# Altium PCB testPCB.PcbDoc
Units mm, origin at the board's own origin, x right, y up, seen from the top; angles counter-clockwise.
Board outline 152.4 x 101.6 mm, 2 copper layers (Top Layer, Bottom Layer); 1 components, 0 nets, 33 pads, 0 vias.
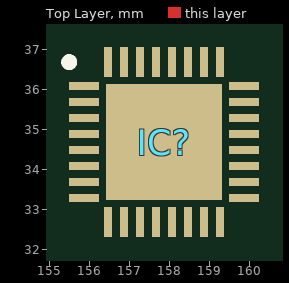
[diagram p0: Top Layer view]
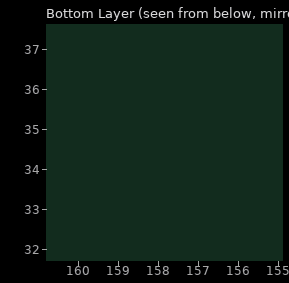
[diagram p1: Bottom Layer view, seen from below]

## Layer stack, top to bottom
Top Solder: solder mask 0.0102, Solder Resist, Dk 3.5
Top Layer: signal copper 0.0356
Dielectric 1: dielectric 0.32, FR-4, Dk 4.8
Bottom Layer: signal copper 0.0356
Bottom Solder: solder mask 0.0102, Solder Resist, Dk 3.5

## Board outline
25.4,25.4 177.8,25.4 177.8,127 25.4,127

## Design rules (kind name [scope] priority, off if disabled: settings)
Clearance [All] p1: gap=0.254 ignorepadtopadclearanceinfootprint=FALSE except(0: Arc-Hole Track-Hole SMDPad-Hole THPad-Hole Via-Hole Fill-Hole Poly-Hole Region-Hole Text-Hole)
PolygonConnect [All] p1: connectstyle=Relief reliefconductorwidth=0.254 reliefentries=4 polygonreliefangle="90 Angle" airgapwidth=0.254
RoomDefinition test_sheet [InComponentClass('test_sheet')] p1: confinementstyle=ConfineIn formatcopy=TRUE lockcomponents=FALSE outline 178.943,26.924 184.531,26.924 184.531,35.052 178.943,35.052
RoutingVias [All] p1: holewidth=0.711 width=1.27 viastyle="Through Hole" minholewidth=0.711 minwidth=1.27 maxholewidth=0.711 maxwidth=1.27
SolderMaskExpansion [All] p1: expansion=0.102 istentingtop=FALSE
Width [All] p1: maxlimit=10 minlimit=0.15 preferedwidth=0.254
30 further rules are at their usual default settings.

## Components (designator, comment, footprint, x,y, rotation, side; value= is the part's Value field where it differs from the comment)
IC? "BQ25731RSNR" QFN40P400X400X80-33N-D 157.861,34.671 r0 top

## Footprints (in the part's own frame and the unit in brackets; to place one, negate y for a bottom-side part, rotate by r counter-clockwise, add the part's x,y. Pads: shape width x height; smd on the part's side, far side on the other; paste and mask are expansions set on the pad)
QFN40P400X400X80-33N-D [mm]
  rect 0.75x0.2 smd: 1(-2,1.4) 2(-2,1) 3(-2,0.6) 4(-2,0.2) 5(-2,-0.2) 6(-2,-0.6) 7(-2,-1) 8(-2,-1.4) 17(2,-1.4) 18(2,-1) 19(2,-0.6) 20(2,-0.2) 21(2,0.2) 22(2,0.6) 23(2,1) 24(2,1.4)
  rect 0.2x0.75 smd: 9(-1.4,-2) 10(-1,-2) 11(-0.6,-2) 12(-0.2,-2) 13(0.2,-2) 14(0.6,-2) 15(1,-2) 16(1.4,-2) 25(1.4,2) 26(1,2) 27(0.6,2) 28(0.2,2) 29(-0.2,2) 30(-0.6,2) 31(-1,2) 32(-1.4,2)
  rect 2.9x2.9 smd: 33(0,0)
  silkscreen extent -2.47,1.9 -2.27,2.1, body extent -2,-2 2,2, height 0.8

## Part data
IC?: "Integrated Circuit", Manufacturer_Name="Texas Instruments", Mouser Part Number=595-BQ25731RSNR, Arrow Part Number=BQ25731RSNR, Arrow Price/Stock=https://www.arrow.com/en/products/bq25731rsnr/texas-instruments?region=nac, Datasheet Link=https://www.ti.com/lit/gpn/bq25731, Height=0.8mm, Manufacturer_Part_Number=BQ25731RSNR, Mouser Price/Stock=https://www.mouser.co.uk/ProductDetail/Texas-Instruments/BQ25731RSNR?qs=stqOd1AaK7%2Fv1jry38xYIQ%3D%3D

## Nets (pads, with @x,y where several pads share a name; then routed paths per layer and width w, separated by ;. In a path a pad name is that pad's centre, name@x,y a point inside that pad or via, vN(x,y) a via of type N, cw(c..) or ccw(c..) an arc to the next point about the centre after c; other vN are vias at no path point)
pads on no net: IC?.1 IC?.2 IC?.3 IC?.4 IC?.5 IC?.6 IC?.7 IC?.8 IC?.9 IC?.10 IC?.11 IC?.12 IC?.13 IC?.14 IC?.15 IC?.16 IC?.17 IC?.18 IC?.19 IC?.20 IC?.21 IC?.22 IC?.23 IC?.24 IC?.25 IC?.26 IC?.27 IC?.28 IC?.29 IC?.30 IC?.31 IC?.32 IC?.33